# Altium PCB PCB2.PcbDoc
Units mil, origin at the board's own origin, x right, y up, seen from the top; angles counter-clockwise.
Board outline 3200 x 1060 mil, 4 copper layers (Top Layer, GND, Power, Bottom Layer), stack 23.756 mil thick; 140 components, 71 nets, 473 pads, 206 vias.
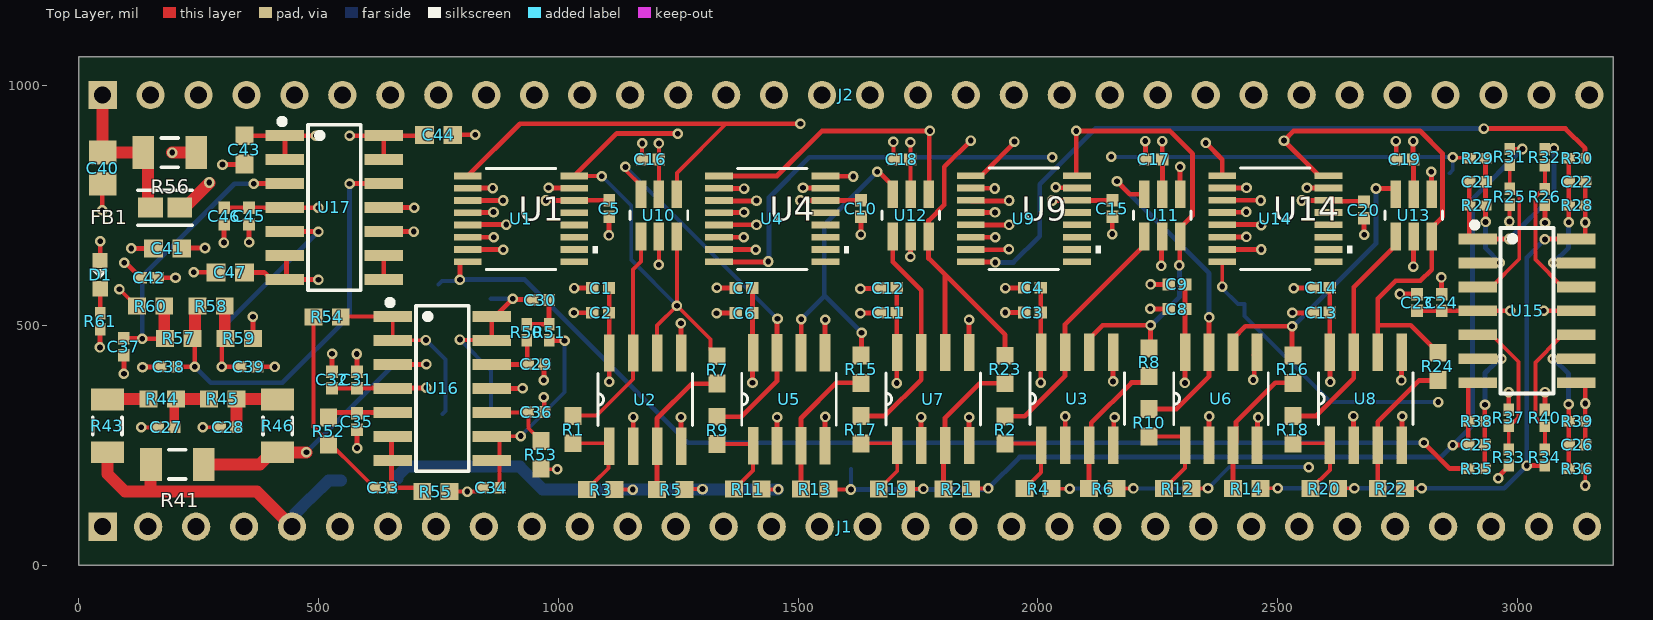
[diagram p0: Top Layer view]
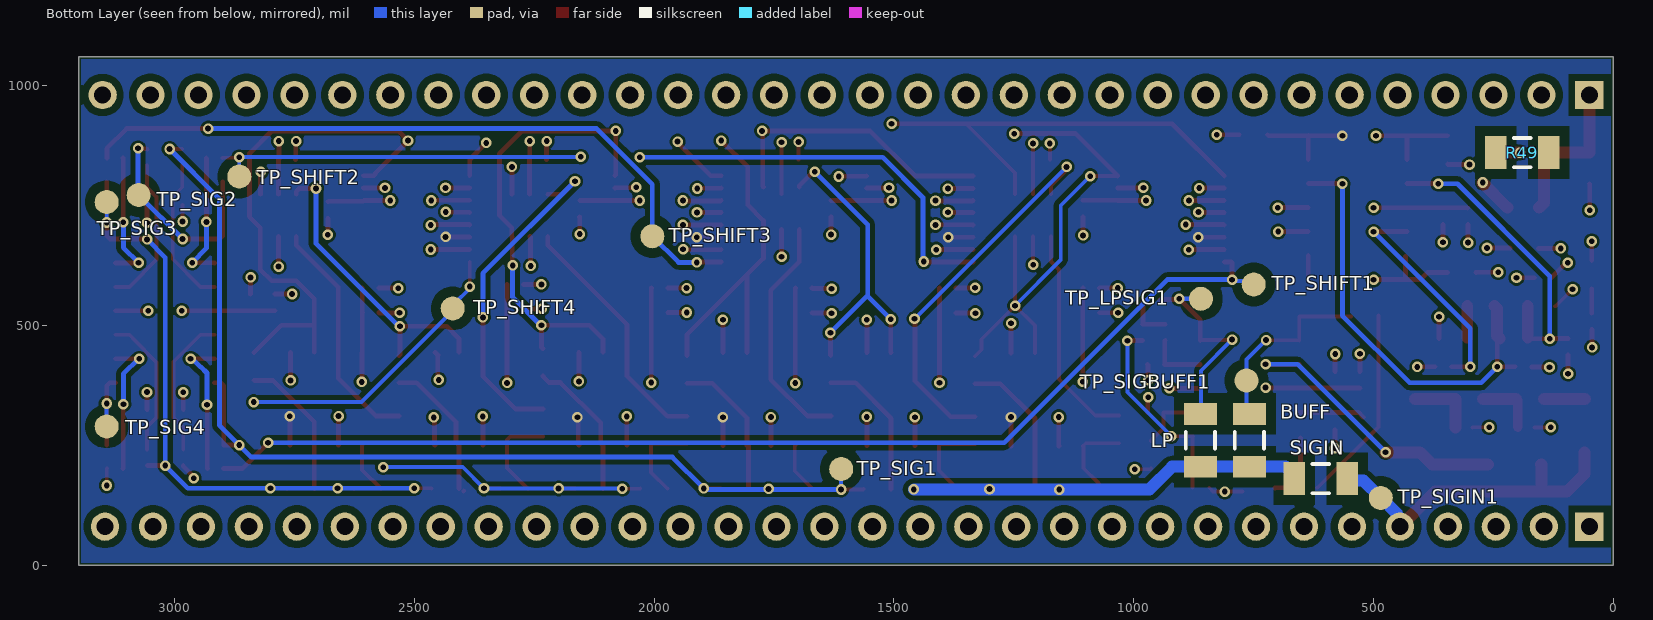
[diagram p1: Bottom Layer view, seen from below]
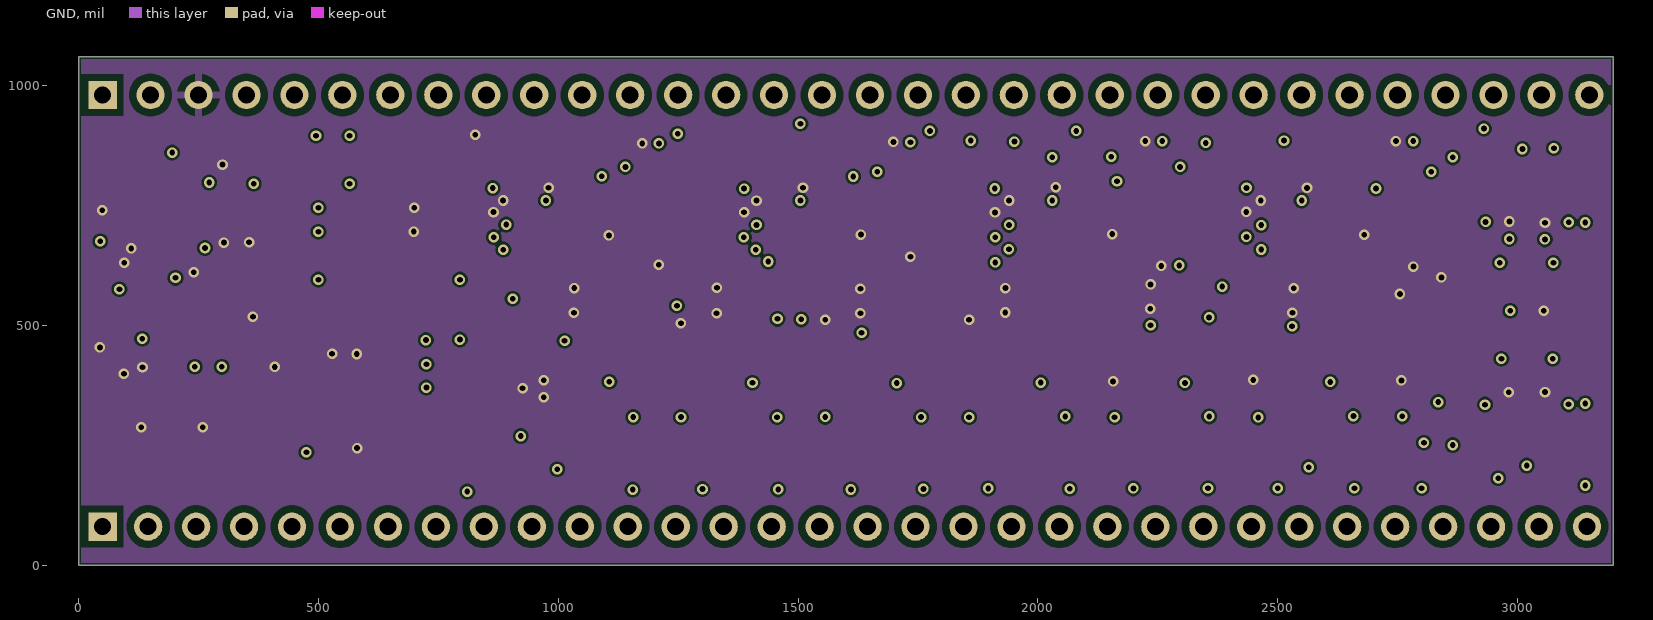
[diagram p2: GND]
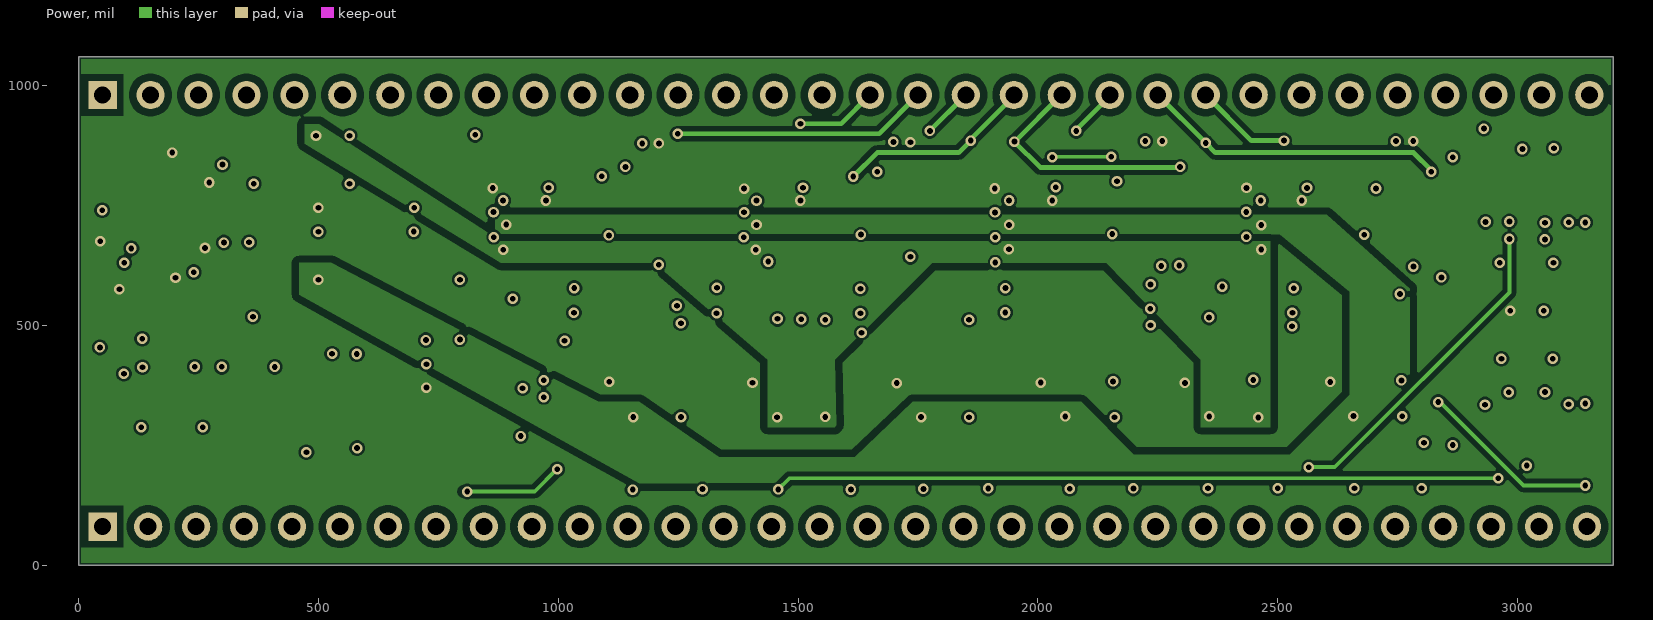
[diagram p3: Power]
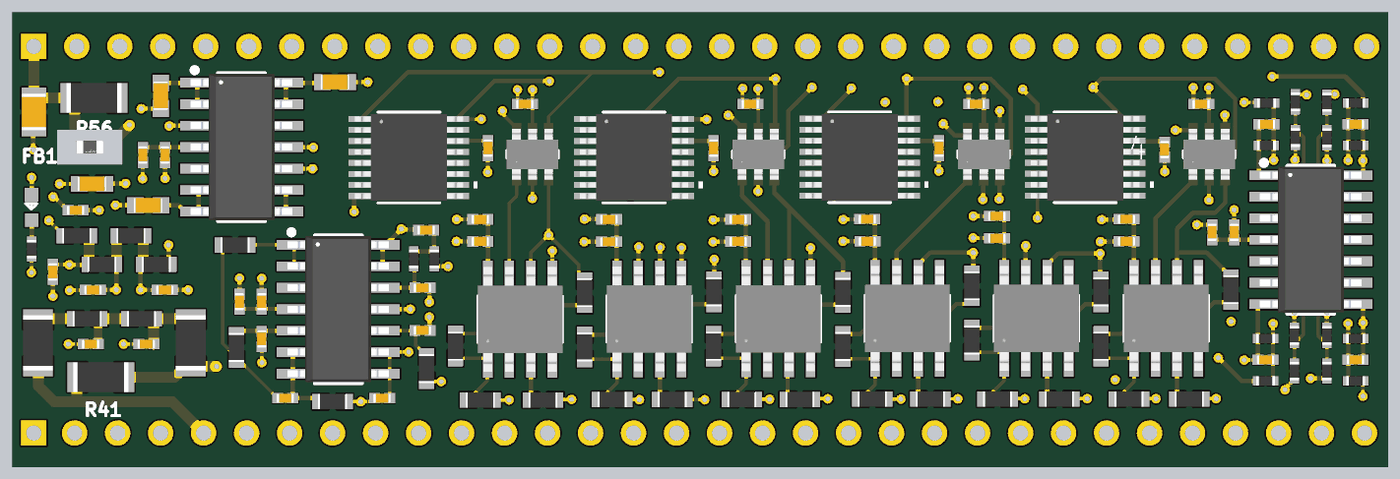
[diagram p4: 3D render of the assembled board from above, using the file's embedded part models]
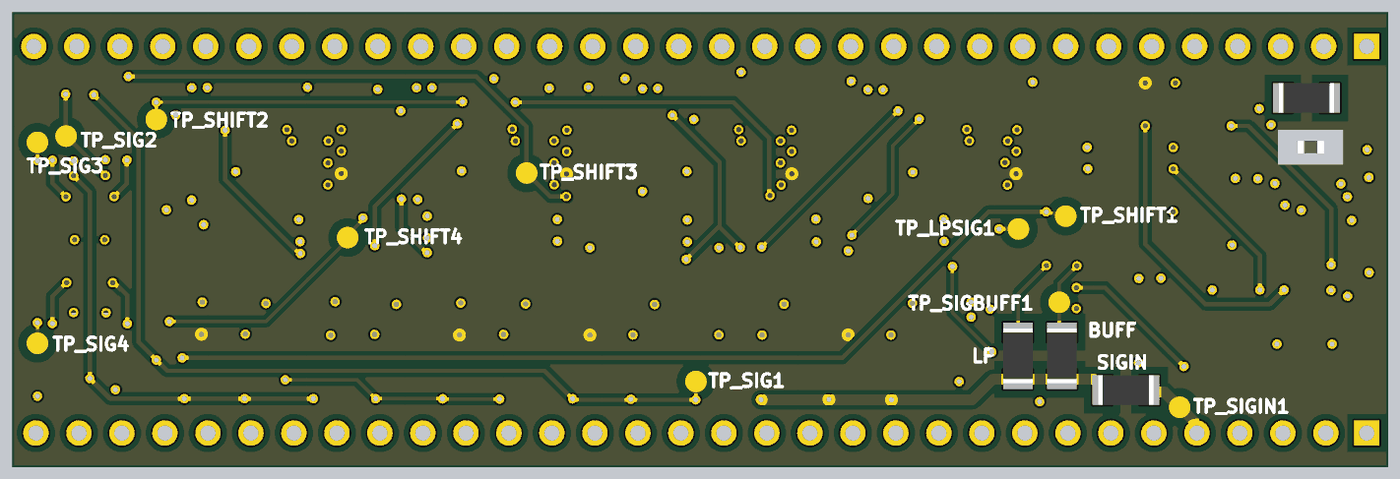
[diagram p5: 3D render of the assembled board from below, using the file's embedded part models]

## Layer stack, top to bottom
Top Solder: solder mask 0.4, Solder Resist, Dk 3.5
Top Layer: signal copper 1.4
Dielectric 2: prepreg 2.8, PP-006, Dk 4.1
GND: signal copper 1.378
Dielectric 1: dielectric 12.6, FR-4, Dk 4.8
Power: signal copper 1.378
Dielectric 3: prepreg 2.8, PP-006, Dk 4.1
Bottom Layer: signal copper 1.4
Bottom Solder: solder mask 0.4, Solder Resist, Dk 3.5

## Board outline
0,0 3200,0 3200,1060 0,1060

## Design rules (kind name [scope] priority, off if disabled: settings)
Clearance Clearance_Poly_Via [InPoly vs IsVia] p1: gap=5 ignorepadtopadclearanceinfootprint=FALSE except(0: Arc-Hole Track-Hole SMDPad-Hole THPad-Hole Via-Hole Fill-Hole Poly-Hole Region-Hole Text-Hole)
Clearance Clearance_Poly_Poly [(InPoly) vs (InPoly)] p2: gap=15 ignorepadtopadclearanceinfootprint=FALSE except(0: Arc-Hole Track-Hole SMDPad-Hole THPad-Hole Via-Hole Fill-Hole Poly-Hole Region-Hole Text-Hole)
Clearance Clearance_Poly_Wires [InPoly vs IsWire] p3: gap=10 ignorepadtopadclearanceinfootprint=FALSE except(0: Arc-Hole Track-Hole SMDPad-Hole THPad-Hole Via-Hole Fill-Hole Poly-Hole Region-Hole Text-Hole)
Clearance Clearance_Poly_KO [(Layer = 'KeepOutLayer') vs (InPoly)] p4: gap=15 ignorepadtopadclearanceinfootprint=FALSE except(0: Arc-Hole Track-Hole SMDPad-Hole THPad-Hole Via-Hole Fill-Hole Poly-Hole Region-Hole Text-Hole)
Clearance Clearance_Poly_Top_Btm [OnLayer('Top Layer') or OnLayer('Bottom Layer') vs InPoly] p5: gap=20 ignorepadtopadclearanceinfootprint=FALSE except(0: Arc-Hole Track-Hole SMDPad-Hole THPad-Hole Via-Hole Fill-Hole Poly-Hole Region-Hole Text-Hole)
Clearance Clearance_KO_All [(Layer = 'KeepOutLayer')] p6: gap=0 ignorepadtopadclearanceinfootprint=FALSE
Clearance Clearance_Poly_All [(InPoly)] p7: gap=15 ignorepadtopadclearanceinfootprint=FALSE except(0: Arc-Hole Track-Hole SMDPad-Hole THPad-Hole Via-Hole Fill-Hole Poly-Hole Region-Hole Text-Hole)
Clearance Clearance_All [All] p8: gap=5 ignorepadtopadclearanceinfootprint=FALSE except(0: Arc-Hole Track-Hole SMDPad-Hole THPad-Hole Via-Hole Fill-Hole Poly-Hole Region-Hole Text-Hole)
ComponentClearance [All] p1 off: gap=10 collisioncheckmode=3 verticalgap=10 showdistances=FALSE
DiffPairsRouting [All] p1: maxlimit=10 minlimit=5 mostfreqgap=5 toplayer_minwidth=5 toplayer_maxwidth=25 toplayer_prefwidth=5 midlayer1_minwidth=5 midlayer1_maxwidth=25 midlayer1_prefwidth=5 midlayer2_minwidth=5 midlayer2_maxwidth=25 midlayer2_prefwidth=5 bottomlayer_minwidth=5 bottomlayer_maxwidth=25 bottomlayer_prefwidth=5 maxuncoupledlength=500
FabricationTestPointUsage TestPointUsage [All] p1 off: valid=0 allowmultiple=FALSE
FabricationTestpoint Testpoint [All] p1 off: side=3 testpointundercomponent=TRUE minsize=40 maxsize=100 preferedsize=60 minholesize=0 maxholesize=40 preferedholesize=32 testpointgrid=1 allowsidetop=TRUE allowsidebottom=TRUE usegrid=TRUE gridtolerance=0.01
FanoutControl Fanout_BGA [IsBGA] p1 off: bgadir=Out bgaviamode=Centered fanoutstyle=Auto fanoutdirection=Alternating viagrid=1 // Fanout_BGA (Default Rule)
FanoutControl Fanout_LCC [IsLCC] p2 off: bgadir=Out bgaviamode=Centered fanoutstyle=Auto fanoutdirection=Alternating viagrid=1 // Fanout_LCC (Default Rule)
FanoutControl Fanout_SOIC [IsSOIC] p3 off: bgadir=Out bgaviamode=Centered fanoutstyle=Auto fanoutdirection=Alternating viagrid=1 // Fanout_SOIC (Default Rule)
FanoutControl Fanout_Small [(CompPinCount < 5)] p4 off: bgadir=Out bgaviamode=Centered fanoutstyle=Auto fanoutdirection=OutThenIn viagrid=1 // Fanout_Small (Default Rule)
FanoutControl Fanout_Default [All] p5 off: bgadir=Out bgaviamode=Centered fanoutstyle=Auto fanoutdirection=Alternating viagrid=1 // Fanout_Default (Default Rule)
Height [All] p1 off: minheight=0 maxheight=1000 prefheight=500
HoleSize [All] p1 off: absolutevalues=TRUE maxlimit=100 minlimit=1 maxpercent=80.000 minpercent=20.000
HoleToHoleClearance [All] p1 off: gap=10 allowstackedmicrovias=TRUE
LayerPairs [All] p1 off: enforce=TRUE
MinimumSolderMaskSliver [All] p1 off: minsoldermaskwidth=10
NetAntennae [All] p1 off: netantennaetolerance=0
PasteMaskExpansion [All] p1 off: expansion=0
PlaneClearance [All] p1 off: clearance=20
PlaneConnect [All] p1 off: planeconnectstyle=Relief reliefexpansion=20 reliefentries=4 reliefconductorwidth=20 reliefairgap=15
PolygonConnect PolygonConnect_vias [All vs isVia] p1: connectstyle=Direct reliefconductorwidth=10 reliefentries=4 polygonreliefangle="90 Angle" airgapwidth=10
PolygonConnect [All] p2: connectstyle=Relief reliefconductorwidth=15 reliefentries=4 polygonreliefangle="90 Angle" airgapwidth=15
RoomDefinition CtDSP_IO [InComponentClass('CtDSP_IO')] p1: confinementstyle=ConfineIn formatcopy=TRUE lockcomponents=FALSE outline 0,0 3200,0 3200,1060 0,1060
RoomDefinition U_CtDPS_Stage [InComponentClass('U_CtDPS_Stage')] p2: confinementstyle=ConfineIn formatcopy=TRUE lockcomponents=FALSE outline 0,0 3200,0 3200,1060 0,1060
RoutingCorners [All] p1 off: cornerstyle=45-Degree minsetback=100 maxsetback=100
RoutingLayers [All] p1 off: top layer_v5=FALSE mid layer 1_v5=TRUE mid layer 2_v5=TRUE bottom layer_v5=TRUE
RoutingPriority [All] p1 off: routingpriority=0
RoutingTopology [All] p1 off: topology=Shortest
RoutingVias [All] p1: holewidth=12 width=22 viastyle="Through Hole" minholewidth=6 minwidth=15 maxholewidth=50 maxwidth=50
SilkToSilkClearance [All] p1 off: silktosilkclearance=10
SilkToSolderMaskClearance SilkscreenOverComponentPads [IsPad] p1 off: minsilkscreentomaskgap=10 clearancetoexposedcopper=TRUE
SolderMaskExpansion SolderMaskExpansion_via [IsVia] p1: expansion=0 istentingtop=FALSE
SolderMaskExpansion [All] p2 off: expansion=4 istentingtop=FALSE
Width [All] p1: maxlimit=100 minlimit=5 preferedwidth=8
6 further rules are at their usual default settings.

## Classes and differential pairs
component class U_CtDPS_Stage: C1 C2 C3 C4 C5 C6 C7 C8 C9 C10 C11 C12 C13 C14 C15 C16 C17 C18 C19 C20 C21 C22 C23 C24 C25 C26 R1 R2 R3 R4 R5 R6 R7 R8 R9 R10 R11 R12 R13 R14 R15 R16 R17 R18 R19 R20 R21 R22 R23 R24 R25 R26 R27 R28 R29 R30 R31 R32 R33 R34 R35 R36 R37 R38 R39 R40 TP_SHIFT1 TP_SHIFT2 TP_SHIFT3 TP_SHIFT4 TP_SIG1 TP_SIG2 TP_SIG3 TP_SIG4 U1 U2 U3 U4 U5 U6 U7 U8 U9 U10 U11 U12 U13 U14 U15
component class CtDSP_IO: BUFF C27 C28 C29 C30 C31 C32 C33 C34 C35 C36 C37 C38 C39 C40 C41 C42 C43 C44 C45 C46 C47 D1 FB1 J1 J2 LP R41 R43 R44 R45 R46 R49 R50 R51 R52 R53 R54 R55 R57 R58 R59 R60 R61 SIGIN TP_LPSIG1 TP_SIGBUFF1 TP_SIGIN1 U16 U17

## Components (designator, comment, footprint, x,y, rotation, side; value= is the part's Value field where it differs from the comment)
BUFF "0" RES_1206 758.74,259.88 r270 bottom (schematic designator R47)
C1 "100nF" C_0402 1088.55,577.41 r180 top
C2 "2.2uF" C_0402 1088.55,526.06 r0 top
C3 "100nF" C_0402 1988.73,526.43 r180 top
C4 "2.2uF" C_0402 1988.48,577.78 r0 top
C5 "100nF" C_0402 1106.32,743.2 r270 top
C6 "100nF" C_0402 1387.68,525.41 r180 top
C7 "2.2uF" C_0402 1387.68,577.41 r0 top
C8 "100nF" C_0402 2290,533.65 r180 top
C9 "2.2uF" C_0402 2290,585 r0 top
C10 "100nF" C_0402 1631.24,743.2 r270 top
C11 "100nF" C_0402 1688.26,526.06 r180 top
C12 "2.2uF" C_0402 1688.26,577.41 r0 top
C13 "100nF" C_0402 2591.4,526.43 r180 top
C14 "2.2uF" C_0402 2591.4,577.78 r0 top
C15 "100nF" C_0402 2155.63,743.2 r270 top
C16 "100nF" C_0402 1192.14,845.68 r180 top
C17 "100nF" C_0402 2241.69,845.68 r180 top
C18 "100nF" C_0402 1716.57,845.68 r180 top
C19 "100nF" C_0402 2765,845.68 r180 top
C20 "100nF" C_0402 2680,740 r270 top
C21 "1pF" C_0402 2916.75,799 r180 top
C22 "1pF" C_0402 3124.2,799 r180 top
C23 "100nF" C_0402 2790.66,547.32 r90 top
C24 "10uF" C_0402 2842.01,547.32 r270 top
C25 "1pF" C_0402 2914.78,250.45 r180 top
C26 "1pF" C_0402 3124.2,250.45 r180 top
C27 "100nF" C_0402 182.32,286.94 r0 top
C28 "10nF" C_0402 311.61,286.94 r0 top
C29 "22nF" C_0402 953.85,418.32 r0 top
C30 "100nF" C_0402 962.68,552.51 r180 top
C31 "10uF" C_0402 580.32,385.86 r90 top
C32 "100nF" C_0402 528.5,385.86 r270 top
C33 "100nF" C_0402 635,161.05 r180 top
C34 "10nF" C_0402 860,161.05 r180 top
C35 "100nF" C_0402 580.32,299.08 r90 top
C36 "4.7nF" C_0402 953.96,318.95 r180 top
C37 "100nF" C_0402 94.38,455.08 r90 top
C38 "100nF" C_0402 187.68,413.27 r0 top
C39 "100nF" C_0402 354.69,413.27 r180 top
C40 "47uF" C_0805 50,827.52 r90 top
C41 "1uF" C_0603 185.47,660 r0 top
C42 "0.1uF" C_0402 147.32,598.81 r180 top
C43 "1uF" C_0603 345.48,865.39 r270 top
C44 "1uF" C_0603 750.51,897.01 r0 top
C45 "10uF" C_0402 355.32,727.32 r270 top
C46 "100nF" C_0402 303.68,727.32 r90 top
C47 "1uF" C_0603 315.95,610 r0 top
D1 "LED_0603" LED_6003 45.37,575.87 r90 top
FB1 "BLM18PG121SN1D" BLM18PG121SN1D 180.32,744.98 r0 top
J1 "DIP32" DIP32#1 45,80 r0 top
J2 "DIP32" DIP32#2 50,980 r0 top
LP "0" RES_1206 861.27,259.88 r270 bottom (schematic designator R48)
R1 "47k" RES_0603 1030.9,282.44 r90 top
R2 "47k" RES_0603 1931.74,281.54 r90 top
R3 "75" RES_0603 1088.55,157.08 r180 top
R4 "75" RES_0603 2000.33,159.2 r180 top
R5 "75" RES_0603 1234.39,157.08 r180 top
R6 "75" RES_0603 2135.34,159.2 r180 top
R7 "47k" RES_0603 1331.13,406.67 r90 top
R8 "47k" RES_0603 2231.85,422.7 r90 top
R9 "47k" RES_0603 1331.13,280.52 r90 top
R10 "47k" RES_0603 2231.85,296.54 r90 top
R11 "75" RES_0603 1395,158.17 r180 top
R12 "75" RES_0603 2291.46,159.2 r180 top
R13 "75" RES_0603 1534.61,158.17 r180 top
R14 "75" RES_0603 2435.33,159.2 r180 top
R15 "47k" RES_0603 1631.64,408.47 r90 top
R16 "47k" RES_0603 2531.96,408.47 r90 top
R17 "47k" RES_0603 1631.24,282.32 r90 top
R18 "47k" RES_0603 2531.96,282.32 r90 top
R19 "75" RES_0603 1696.89,158.23 r180 top
R20 "75" RES_0603 2597.25,159.2 r180 top
R21 "75" RES_0603 1831.81,158.23 r180 top
R22 "75" RES_0603 2737.23,159.2 r180 top
R23 "47k" RES_0603 1931.74,407.7 r90 top
R24 "47k" RES_0603 2834.14,413.97 r90 top
R25 "20K" RES_0402 2983.84,768.01 r90 top
R26 "20K" RES_0402 3057.1,767.33 r90 top
R27 "20K" RES_0402 2916.75,749.62 r180 top
R28 "20K" RES_0402 3124.33,749.62 r180 top
R29 "5K" RES_0402 2917.09,848.38 r0 top
R30 "5K" RES_0402 3124.2,848.38 r0 top
R31 "5K" RES_0402 2983.84,850.85 r270 top
R32 "5K" RES_0402 3057.1,850.18 r90 top
R33 "5K" RES_0402 2981.88,224.27 r90 top
R34 "5K" RES_0402 3057.1,224.27 r270 top
R35 "5K" RES_0402 2914.78,201.07 r0 top
R36 "5K" RES_0402 3124.33,201.07 r0 top
R37 "20K" RES_0402 2981.88,307.12 r90 top
R38 "20K" RES_0402 2914.78,299.83 r180 top
R39 "20K" RES_0402 3124.2,299.83 r180 top
R40 "20K" RES_0402 3057.1,307.12 r90 top
R41 "0" RES_1206 205.84,210 r0 top
R43 "0" RES_1206 60,290 r90 top
R44 "330" RES_0603 174.34,346.16 r0 top
R45 "3.3k" RES_0603 300.49,346.16 r0 top
R46 "0" RES_1206 415,290 r270 top
R49 "0" RES_1206 190,860 r0 bottom
R50 "220" RES_0402 934.17,485.41 r90 top
R51 "470" RES_0402 981.58,485.41 r270 top
R52 "330" RES_0603 521.1,279.39 r90 top
R53 "2.2k" RES_0603 963.81,230 r270 top
R54 "150" RES_0603 518.07,517.53 r180 top
R55 "3.3k" RES_0603 745,153.17 r180 top
R56 "0" RES_1206 190,860 r0 top
R57 "1k" RES_0603 208.54,472.49 r0 top
R58 "1k" RES_0603 276.15,539.59 r0 top
R59 "1k" RES_0603 335,472.49 r0 top
R60 "1k" RES_0603 150,539.59 r0 top
R61 "1k" RES_0402 45,508.27 r270 top
SIGIN "0" RES_1206 610.12,180 r0 bottom (schematic designator R42)
TP_LPSIG1 "TESTPOINT" TESTPOINT 860,555 r90 bottom
TP_SHIFT1 "TESTPOINT" TESTPOINT 750,585 r90 bottom
TP_SHIFT2 "TESTPOINT" TESTPOINT 2865,810 r0 bottom
TP_SHIFT3 "TESTPOINT" TESTPOINT 2003.78,685.41 r90 bottom
TP_SHIFT4 "TESTPOINT" TESTPOINT 2420,535 r90 bottom
TP_SIG1 "TESTPOINT" TESTPOINT 1610,200 r90 bottom
TP_SIG2 "TESTPOINT" TESTPOINT 3074.82,771.31 r90 bottom
TP_SIG3 "TESTPOINT" TESTPOINT 3141.52,756.59 r90 bottom
TP_SIG4 "TESTPOINT" TESTPOINT 3141.52,289.01 r90 bottom
TP_SIGBUFF1 "TESTPOINT" TESTPOINT 765,384.46 r90 bottom
TP_SIGIN1 "TESTPOINT" TESTPOINT 485,140 r90 bottom
U1 "ADG709BRUZ-REEL7" ADG709BRUZ-REEL7 923.46,720.59 r0 top
U2 "TLV3502AIDR" TLV3502AIDR 1181.08,345 r90 top
U3 "TLV3502AIDR" TLV3502AIDR 2081.8,346.75 r90 top
U4 "" ADG709BRUZ-REEL7 1447.01,720.59 r0 top
U5 "TLV3502AIDR" TLV3502AIDR 1481.18,345.73 r90 top
U6 "TLV3502AIDR" TLV3502AIDR 2381.9,346.75 r90 top
U7 "TLV3502AIDR" TLV3502AIDR 1781.69,346.11 r90 top
U8 "TLV3502AIDR" TLV3502AIDR 2683.8,346.75 r90 top
U9 "ADG709BRUZ-REEL7" ADG709BRUZ-REEL7 1971.93,720.96 r0 top
U10 "SN74LVC1G386DBVR" SN74LVC1G386DBVR 1205,730 r90 top
U11 "SN74LVC1G386DBVR" SN74LVC1G386DBVR 2254.31,730 r90 top
U12 "SN74LVC1G386DBVR" SN74LVC1G386DBVR 1729.92,730 r90 top
U13 "SN74LVC1G386DBVR" SN74LVC1G386DBVR 2778.68,730 r90 top
U14 "ADG709BRUZ-REEL7" ADG709BRUZ-REEL7 2496.32,720.96 r0 top
U15 "ADA4891-4ARZ-R7" ADA4891-4ARZ-R7 3021.69,540 r0 top
U16 "ADA4891-4ARZ-R7" ADA4891-4ARZ-R7 760,378.18 r0 top
U17 "ADA4891-4ARZ-R7" ADA4891-4ARZ-R7 535,755.56 r0 top

## Footprints (in the part's own frame and the unit in brackets; to place one, negate y for a bottom-side part, rotate by r counter-clockwise, add the part's x,y. Pads: shape width x height; smd on the part's side, far side on the other; paste and mask are expansions set on the pad)
ADA4891-4ARZ-R7 [mil]
  rect 80.24x22.6 smd: 1(-104.88,139.98) 2(-104.88,89.98) 3(-104.88,39.98) 4(-104.88,-10.02) 5(-104.88,-60.02) 6(-104.88,-110.02) 7(-104.88,-160.02) 8(101.34,-160.02) 9(101.34,-110.02) 10(101.34,-60.02) 11(101.34,-10.02) 12(101.34,39.98) 13(101.34,89.98) 14(101.34,139.98)
  silkscreen extent -117,-183 53,175, body extent -120,-180 116,161, height 69
ADG709BRUZ-REEL7 [mil]
  rect 58x14 smd paste+0 mask+0: 1(-112,90.57) 2(-112,64.98) 3(-112,39.39) 4(-112,13.8) 5(-112,-11.8) 6(-112,-37.39) 7(-112,-62.98) 8(-112,-88.57) 9(110,-88.57) 10(110,-62.98) 11(110,-37.39) 12(110,-11.8) 13(110,13.8) 14(110,39.39) 15(110,64.98) 16(110,90.57)
  silkscreen extent -73,-104 159,106, body extent -127,-100 125,102, height 47
BLM18PG121SN1D [mil]
  rect 51.42x41.66 smd paste+0 mask+0: 1(-30.55,0) 2(30.55,0)
  silkscreen extent -56,-37 56,37, body extent -76,-41 76,41, height 10
C_0402 [mm]
  rect 0.66x0.62 smd paste+0 mask+0.051: 1(-0.44,0) 2(0.44,0)
  body extent -0.53,-0.28 0.53,0.28, height 0.55
C_0603 [mm]
  rect 1x0.95 smd: 1(-0.75,0) 2(0.75,0)
  body extent -0.85,-0.45 0.85,0.45, height 0.9
C_0805 [mm]
  rect 1.25x1.45 smd: 1(-0.825,0) 2(0.825,0)
  body extent -1.1,-0.72 1.1,0.72, height 1.45
DIP32#1 [mm]
  rect 1.5x1.5 hole 0.9: 1(0.127,0)
  round 1.5 hole 0.9: 2(2.54,0) 3(5.08,0) 4(7.62,0) 5(10.16,0) 6(12.7,0) 7(15.24,0) 8(17.78,0) 9(20.32,0) 10(22.86,0) 11(25.4,0) 12(27.94,0) 13(30.48,0) 14(33.02,0) 15(35.56,0) 16(38.1,0) 17(40.64,0) 18(43.18,0) 19(45.72,0) 20(48.26,0) 21(50.8,0) 22(53.34,0) 23(55.88,0) 24(58.42,0) 25(60.96,0) 26(63.5,0) 27(66.04,0) 28(68.58,0) 29(71.12,0) 30(73.66,0) 31(76.2,0) 32(78.74,0)
DIP32#2 [mm]
  rect 1.5x1.5 hole 0.9: 1(0,0)
  round 1.5 hole 0.9: 2(2.54,0) 3(5.08,0) 4(7.62,0) 5(10.16,0) 6(12.7,0) 7(15.24,0) 8(17.78,0) 9(20.32,0) 10(22.86,0) 11(25.4,0) 12(27.94,0) 13(30.48,0) 14(33.02,0) 15(35.56,0) 16(38.1,0) 17(40.64,0) 18(43.18,0) 19(45.72,0) 20(48.26,0) 21(50.8,0) 22(53.34,0) 23(55.88,0) 24(58.42,0) 25(60.96,0) 26(63.5,0) 27(66.04,0) 28(68.58,0) 29(71.12,0) 30(73.66,0) 31(76.2,0) 32(78.74,0)
LED_6003 [mm]
  rect 0.8x0.8 smd: 1(0.004,0.009) 2(1.502,0.009)
  silkscreen extent 0.63,-0.31 0.97,0.37, body extent -0.05,-0.39 1.55,0.41, height 0.35
RES_0402 [mm]
  rect 0.65x0.55 smd paste+0 mask+0.05: 1(-0.425,0) 2(0.425,0)
  body extent -0.55,-0.28 0.55,0.28, height 0.35
RES_0603 [mm]
  rect 0.95x0.9 smd: 1(-0.725,0) 2(0.725,0)
  body extent -0.85,-0.45 0.85,0.45, height 0.55
RES_1206 [mm]
  rect 1.15x1.75 smd: 1(-1.4,0) 2(1.4,0)
  silkscreen extent -0.45,-0.77 0.45,0.77, body extent -1.63,-0.87 1.63,0.87, height 0.65
SN74LVC1G386DBVR [mil]
  rect 58x22 smd paste-29 mask-29: 1(-45,32.4) 2(-45,-5) 3(-45,-42.4) 4(43,-42.4) 5(43,-5) 6(43,32.4)
  silkscreen extent -10,-65 8,55, body extent -60,-65 58,55, height 57
TESTPOINT [mil]
  round 50 smd paste-99999 mask+0: 1(0,0)
TLV3502AIDR [mil]
  rect 78x22 smd: 1(-97,75) 2(-97,25) 3(-97,-25) 4(-97,-75) 5(97,-75) 6(97,-25) 7(97,25) 8(97,75)
  silkscreen extent -54,-98 54,98, body extent -122,-99 122,99, height 69

## Part data
BUFF LP R41 R43 R46 R49 R56 SIGIN: library part RES_1206, LCSC Part #=C17888
C1 C3 C5 C6 C8 C10 C11 C13 C15 C16 C17 C18 C19 C20 C23 C27 C30 C32 C33 C35 C37 C38 C39 C42 C46: library part C_0402, LCSC Part #=C1525
C2 C4 C7 C9 C12 C14: library part C_0402, LCSC Part #=C12530
C21 C22 C25 C26: library part C_0402, LCSC Part #=C1550
C24 C31 C45: library part C_0402, LCSC Part #=C15525
C28 C34: library part C_0402, LCSC Part #=C15195
C29: library part C_0402, LCSC Part #=C1532
C36: library part C_0402, LCSC Part #=C1538
C40: library part C_0805, LCSC Part #=C16780
C41 C43 C44 C47: library part C_0603, LCSC Part #=C15849
D1: LCSC Part #=C2286
FB1: "-55℃~+125℃ 1 120Ω@100MHz 2A 50mΩ ±25% 0603 Ferrite Beads ROHS", LCSC Part #=C14709
R1 R2 R7 R8 R9 R10 R15 R16 R17 R18 R23 R24: library part RES_0603, LCSC Part #=C25819
R3 R4 R5 R6 R11 R12 R13 R14 R19 R20 R21 R22: library part RES_0603, LCSC Part #=C4275
R25 R26 R27 R28 R37 R38 R39 R40: library part RES_0402, LCSC Part #=C25765
R29 R30 R31 R32 R33 R34 R35 R36: library part RES_0402, LCSC Part #=C5948099
R44 R52: library part RES_0603, LCSC Part #=C23138
R45 R55: library part RES_0603, LCSC Part #=C22978
R50: library part RES_0402, LCSC Part #=C25091
R51: library part RES_0402, LCSC Part #=C25117
R53: library part RES_0603, LCSC Part #=C4190
R54: library part RES_0603, LCSC Part #=C22808
R57 R58 R59 R60: library part RES_0603, LCSC Part #=C5123612
R61: library part RES_0402, LCSC Part #=C11702
U1 U9 U14: "CMOS Low Voltage, 3 Î© 4-Channel Multiplexer", LCSC Part #=C206785
U2 U3 U5 U6 U7 U8: "Dual 4.5ns Push-pull Rail-to-Rail Input, Rail-to-Rail Output TTL Comparators", LCSC Part #=C131165
U4: library part ADG709BRUZ-REEL7, "CMOS Low Voltage, 3 Î© 4-Channel Multiplexer", LCSC Part #=C206785
U10 U11 U12 U13: "Single 3-input, 1.65-V to 5.5-V XOR (exclusive OR) gate 6-SOT-23 -40 to 125", LCSC Part #=C2838503
U15 U16 U17: "Quad Rail-to-Rail Op-Amp, 240 MHz, 170 V/µs, SOT-23-5", LCSC Part #=C654290

## Via types
v1: diameter 22, hole 12, Top Layer to Bottom Layer, 206 vias

## Nets (pads, with @x,y where several pads share a name; then routed paths per layer and width w, separated by ;. In a path a pad name is that pad's centre, name@x,y a point inside that pad or via, vN(x,y) a via of type N, cw(c..) or ccw(c..) an arc to the next point about the centre after c; other vN are vias at no path point)
+1.25: C47.2 U1.5 U2.2 U3.2 U4.5 U7.2 U8.2 U9.5 U14.5 U17.6 U17.7 | length 766.6
  Top Layer w10: C47.2 386.84,610 401.3,595.54 U17.7 ; U17.7@433.59,595.54 433.59,643.13 U17.6@433.8,643.33 ; U17.7@435.08,595.27 499.73,595.27 v1(500,595) ; U1.5 812.47,709.81 v1(891.42,709.81) ; U2.2 1156.3,248.22 1156.3,308.15 v1(1156.51,308.37) ; U4.5 1335.75,709.53 1412.88,709.53 v1(1413.42,708.98) ; v1(1756.52,308.45) 1756.6,308.36 1756.6,249.19 U7.2 ; U9.5 1939.95,709.17 v1(1939.99,709.12) ; U3.2 2057.05,250 2057.05,309.5 v1(2057.3,309.75) ; U14.5 2385.29,710.14 2464.55,710.14 v1(2465.84,708.84) ; v1(2658,310.44) 2658.4,310.04 2658.4,250.15 U8.2
+1.25L: C39.2 R58.2 R59.1 U17.5 | length 599
  Top Layer w10: R59.1@297.94,469.73 298.38,469.29 v1(298.38,413.18) ; R59.1@304.69,474.25 R59.1 ; C39.2 337.32,413.22 v1(298.38,413.18) ; U17.5 430.39,695.27 499.73,695.27 v1(500,695) ; v1(298.38,413.18) v1(298.38,413.18)
  Top Layer w25: R59.1@304.69,474.25 R58.2
  Bottom Layer w10: v1(298.38,413.18) 298.38,493.38 v1(500,695)
+2.5: C44.1 U1.6 U2.4 U3.4 U4.6 U7.4 U8.4 U9.6 U14.6 U17.13 U17.14 | length 655.4
  Top Layer w10: v1(565,895) U17.14@636.34,895 ; U17.13 U17.14@636.34,895 ; U17.14 U17.14@636.34,895 ; C44.1 718.97,895 U17.14@636.34,895 ; U1.6 811.66,683.41 865.46,683.41 v1(865.67,683.61) ; v1(1255.93,308.37) 1256.01,308.3 1256.01,248.07 U2.4 ; U4.6 1335.17,683.36 1386.89,683.36 v1(1387.06,683.53) ; v1(1856.52,308.19) 1856.6,308.1 1856.6,249.19 U7.4 ; U9.6 1860.13,683.37 1910.76,683.37 v1(1910.97,683.17) ; U3.4 2158.38,251.34 2158.38,306.61 v1(2159.97,308.2) ; U14.6 2384.52,683.78 2434.73,683.78 v1(2434.93,683.98) ; U8.4 2759.4,250.35 2759.4,309.4 v1(2760,310)
+2.5L: C38.2 R57.2 R58.1 U17.12 | length 911.1
  Top Layer w10: C38.2 205.06,413.33 241.97,413.33 v1(242.03,413.39) 242.03,467.55 R57.2 ; v1(565,795) 565.27,795.27 636.07,795.27 U17.12
  Top Layer w25: R57.2 242.29,477.69 242.29,534.37 247.5,539.59 R58.1
  Bottom Layer w10: v1(242.03,413.39) 275.41,380 425,380 565,520 v1(565,795)
+3.75: C43.1 U1.7 U4.7 U5.2 U5.4 U6.2 U6.4 U9.7 U14.7 U17.1 U17.2 | length 750.9
  Top Layer w10: C43.1 345.56,895 U17.1@430.12,895 ; U17.2 U17.1@430.12,895 ; v1(495,895) U17.1@430.12,895 ; U1.7 811.52,657.55 885.51,657.55 v1(885.58,657.48) ; U4.7@1335.09,657.53 v1(1411.87,657.53) ; U5.2 v1(1456.21,308.3) ; U5.4 1556.4,248.94 1556.4,308.47 v1(1556.61,308.68) ; U9.7 1860.75,657.17 1938.76,657.17 v1(1939.72,658.12) ; U6.2 2357.06,249.91 2357.06,309.61 v1(2357.21,309.76) ; U14.7 2465.67,657.98 v1(2465.84,657.8) ; U6.4 2458.17,251.02 2458.17,306.4 v1(2459.43,307.66)
+3.75L: C37.2 R57.1 R60.2 U17.3 | length 662
  Top Layer w10: C37.2 94.66,472.13 132.21,472.13 v1(132.49,471.86) 179.37,471.86 R57.1 R57.1@178.54,473.95 ; v1(365,795) 365.27,795.27 429.85,795.27 U17.3
  Top Layer w25: R57.1@178.54,473.95 R60.2
  Bottom Layer w10: v1(132.49,471.86) 132.49,602.49 325,795 v1(365,795)
+5: C1.1 C2.2 C3.1 C4.2 C5.1 C6.1 C7.2 C8.1 C9.2 C10.1 C11.1 C12.2 C13.1 C14.2 C15.1 C16.1 C17.1 C18.1 C19.1 C20.1 C23.1 C24.2 C31.1 C32.2 C41.2 C42.1 C45.1 C46.2 D1.2 FB1.2 R56.2 R60.1 U1.2 U1.14 U2.8 U3.8 U4.2 U4.14 U5.8 U6.8 U7.8 U8.8 U9.2 U9.14 U10.5 U11.5 U12.5 U13.5 U14.2 U14.14 U15.4 U16.4 U17.4 | length 3244.5
  Top Layer w8: v1(85,575) 85.06,575 120.47,539.59 R60.1 ; U10.5 v1(1210,879) ; v1(1734.24,881.42) 1734.58,881.08 1734.58,773.34 U12.5
  Top Layer w10: D1.2 v1(45,675) ; C42.1 164.7,598.76 201.96,598.76 v1(202.01,598.71) ; C41.2 215.92,660.92 v1(263.5,660.92) ; FB1.2@216.11,745 FB1.2@220.99,745 ; v1@272.5,796.51 v1(272.5,797.5) ; C46.2 303.86,744.82 499.82,744.82 v1(500,745) ; C32.2 529.18,369.23 724.4,369.23 v1(725.09,369.91) ; U1.2 811.66,785.77 863.25,785.77 v1(863.46,785.97) ; v1(974.37,760.05) v1(974.37,760.05) 1032.91,760.01 1033.46,760.56 C5.1@1106.29,760.56 ; C1.1 1106.23,577.05 1106.23,382.49 v1(1106.59,382.13) ; U4.2 1335.35,785.23 1387.15,785.23 v1(1387.48,784.89) ; v1(1405,380) C6.1 C7.2 ; v1(1505,760) 1505.26,760.26 1630.98,760.26 C10.1 ; C12.2 1705.82,577.18 1705.82,379.55 v1(1706.05,379.32) ; U9.2 1860.4,785.47 1909.53,785.47 v1(1910,785) ; C4.2 2006.05,577.54 2006.05,380.66 v1(2006.29,380.42) ; v1(2030.04,760) 2030.31,760.26 2154.63,760.26 C15.1@2154.89,760.53 ; U11.5 2259.74,773.42 2259.74,845.68 2259.3,846.12 2259.3,883.71 v1(2259.59,884) ; v1(2306.65,379.57) 2306.99,379.91 2306.99,584.66 C9.2 ; U14.2 2384.52,786.13 2434.81,786.13 v1(2435,786.33) ; v1(2550,760) 2550.17,760.17 2604.73,760.17 2606.32,758.58 2678.75,758.58 C20.1 ; C14.2 2608.72,526.88 2608.27,526.43 2608.76,525.94 2608.76,444.24 2609.33,443.67 2609.33,382.31 v1(2609.86,381.78) ; v1(2782.6,884) 2782.46,883.86 2782.46,846.36 2783.14,845.68 2783.14,773.54 U13.5 ; C23.1 v1(2984.99,530.01)
  Top Layer w25: v1(195,860) R56.2 ; FB1.2@220.99,745 v1@272.5,796.51
+5IN: C40.2 FB1.1 J2.1 R56.1 | length 328.2
  Top Layer w25: J2.1 C40.2 R56.1 145,849.88 145,755 FB1.1@155,745
B1: J2.17 U1.1 U10.4 | length 1098
  Top Layer w8: U10.4 1247.4,817.4 1350,920
  Top Layer w10: U1.1 920.3,920 1350,920 v1(1505,920)
  Power w10: v1(1505,920) 1590,920 J2.17
B2: J2.18 R7.2 U1.16 U2.6 U10.3 | length 1580
  Top Layer w8: U1.16 1033.63,810.98 1090.55,810.98 v1(1090.72,810.81) ; U2.6 1206.08,499.31 v1(1247.4,540.63) ; U10.3 v1(1247.4,540.63) ; R7.2 1317.41,448.93 1317.41,470.62 v1(1247.4,540.63)
  Top Layer w10: U1.16 1122.3,900 1248,900 v1(1249,899)
  Power w10: v1(1249,899) 1669,899 J2.18
  Bottom Layer w8: v1(1090.72,810.81) 1152.41,749.12 1152.41,635.62 v1(1247.4,540.63)
B3: J2.19 U4.1 U12.4 | length 703
  Top Layer w10: U4.1 1456.15,811.15 1550,905 v1(1775,905) 1773.66,903.66 1773.66,789.34 U12.4@1772.32,788
  Power w10: v1(1775,905) J2.19
B4: J2.20 R23.2 U4.16 U7.6 U12.3 | length 1179.8
  Top Layer w10: U4.16 1557.59,810.58 1614.42,810.58 v1(1615,810) ; U7.6 1806.69,605 ; v1(1860,885) 1805,830 1805,750.68 1772.32,718 1772.32,639.37 1806.69,605 ; R23.2 1931.74,479.95 1806.69,605
  Power w10: v1(1615,810) 1665,860 1835,860 v1(1860,885) 1860,887.5 1950,977.5 J2.20
B5: J2.21 U9.1 U11.4 | length 685.8
  Top Layer w10: U9.1 1881.93,811.53 1951.13,880.73 v1(1951.13,882.82) ; U11.4@2296.54,773.46 2296.63,773.55 2296.63,829.91 v1(2296.54,830)
  Power w10: J2.21 2049.16,980 1951.97,882.82 v1(1951.13,882.82) 2004.95,829 2295.54,829 v1(2296.54,830)
B6: J2.22 R8.2 U3.6 U9.16 U11.3 | length 1073.7
  Top Layer w10: U9.16 2080,813.46 v1(2080,905) 2275.3,905 2322.72,857.58 2322.72,729 2296.72,703 U11.3 2295.89,684.17 2295.89,625.41 v1(2295.06,624.58) ; U3.6 2106.8,471.75 2135.04,500 v1(2235,500) 2235,454.39 R8.2
  Power w10: v1(2080,905) 2080,907.5 2150,977.5 J2.22
  Bottom Layer w10: v1(2235,500) 2236.96,500 2295.06,558.11 v1(2295.06,624.58)
B7: J2.23 U13.4 U14.1 | length 768.5
  Top Layer w10: v1(2350,880) 2384.5,845.5 2384.5,813.53 2384.32,813.36 U14.1 ; v1(2820,820) 2820.54,819.46 2820.54,773.54 U13.4
  Power w10: J2.23 v1(2350,880) 2370,860 2783.25,860 2820,823.25 v1(2820,820)
B8: J2.24 R24.2 U8.6 U13.3 U14.16 | length 1336.2
  Top Layer w10: U14.16 2584.32,811.53 2582.32,813.53 2582.32,815.92 v1(2513.25,885) 2533.25,905 2796.77,905 2844,857.77 2844,725.92 2821.08,703 U13.3 2821.08,616.08 2797.64,592.64 2745.87,592.64 2708.8,555.57 2708.8,500 ; U8.6 2708.8,500 ; R24.2 2834.14,443.5 2777.64,500 2708.8,500
  Power w10: J2.24 2445,885 v1(2513.25,885)
COMP1_S1: R1.2 U2.7 U10.1 | length 460.7
  Top Layer w8: R1.2@1030.9,311.74 1080.25,311.74 1155.76,387.25 U2.7@1155.76,441.89 ; U2.7@1155.87,442 1155.87,615.87 1172.6,632.6 U10.1
COMP1_S2: R17.2 U7.7 U12.1 | length 494.7
  Top Layer w10: R17.2 1680.86,310.86 1756.69,386.69 U7.7 1756.69,572.71 1697.52,631.89 U12.1@1697.52,700
COMP1_S3: R2.2 U3.7 U11.1 | length 519.1
  Top Layer w10: R2.2 1972.73,310.09 2056.8,394.16 2056.8,501.88 2221.91,667 U11.1
COMP1_S4: R18.2 U8.7 U13.1 | length 491.2
  Top Layer w10: R18.2 2580.23,310.86 2658.8,389.44 U8.7 2658.8,579.53 2746.28,667 U13.1
COMP3_S1: R9.2 U5.7 U10.6 | length 804.6
  Top Layer w8: v1(1140,830) 1142.68,827.32 1142.68,820.92 1172.6,791 U10.6
  Top Layer w10: R9.2 1381.39,309.06 1456.29,383.96 U5.7@1456.29,442.62 ; U5.7 1456.18,512.24 v1(1457.14,513.2)
  Bottom Layer w8: v1(1140,830) 1140.34,830 v1(1457.14,513.2)
COMP3_S2: R15.2 U5.6 U12.6 | length 647.3
  Top Layer w10: U5.6 1506.51,443.05 1506.51,511.84 v1(1506.84,512.16) ; R15.2 1632.53,437.91 v1(1632.53,484.25) ; v1(1665,820) 1667.3,817.7 1670.81,817.7 1697.52,791 U12.6@1697.52,788
  Bottom Layer w10: v1(1506.84,512.16) 1554.84,560.16 ; v1(1632.53,484.25) 1556.62,560.16 1554.84,560.16 ; v1(1665,820) 1554.84,709.84 1554.84,560.16
COMP3_S3: R10.2 U6.7 U11.6 | length 707.8
  Top Layer w10: v1(2165,800) 2192,773 U11.6 ; R10.2 2288.94,325.09 2357.03,393.18 v1(2357.03,516.19)
  Bottom Layer w10: v1(2165,800) 2357.03,607.97 v1(2357.03,516.19)
COMP3_S4: R16.2 U6.6 U13.6 | length 637.4
  Top Layer w10: U6.6 2406.9,471.75 2432.9,497.75 2527.75,497.75 2530,500 2530,438.97 R16.2 ; v1(2705,785) 2740.28,785 2746.28,779 U13.6
  Bottom Layer w10: v1(2530,498) 2532.7,498 2705,670.3 v1(2705,785)
GND: C1.2 C2.1 C3.2 C4.1 C5.2 C6.2 C7.1 C8.2 C9.1 C10.2 C11.2 C12.1 C13.2 C14.1 C15.2 C16.2 C17.2 C18.2 C19.2 C20.2 C23.2 C24.1 C27.1 C28.1 C29.2 C31.2 C32.1 C35.1 C36.1 C37.1 C38.1 C39.1 C40.1 C41.1 C42.2 C43.2 C44.2 C45.2 C46.1 C47.1 J2.3 R25.1 R26.1 R37.2 R40.2 R59.2 R61.2 U1.3 U1.4 U1.15 U2.5 U3.5 U4.3 U4.4 U4.15 U5.5 U6.5 U7.5 U8.5 U9.3 U9.4 U9.15 U10.2 U11.2 U12.2 U13.2 U14.3 U14.4 U14.15 U15.11 U16.11 U17.10 U17.11 | length 3400.3
  Top Layer w8: v1(130.44,287) 164.93,287 C27.1 ; v1(258.73,287.09) 294.13,287.09 C28.1 ; C16.2 1175,845.86 v1(1175,879) ; v1(1209.61,626.22) 1209.8,626.42 1209.8,684.8 U10.2 ; v1(1698.91,882.18) 1698.91,846.02 C18.2 ; v1(2983.32,716.16) 2983.58,716.42 2983.58,751.01 R25.1
  Top Layer w10: v1(44.48,453.61) 44.74,453.87 44.74,491.28 R61.2 ; v1(49.09,739.52) 49.09,794.13 C40.1 ; C37.1 94.42,437.72 94.42,398.8 v1(94.46,398.76) ; v1(95,630) 98.02,630 129.21,598.81 C42.2 ; v1(110,660) C41.1 ; v1(133.17,412.3) 133.66,412.78 169.87,412.78 C38.1 ; v1(240.06,610.56) 285.86,610.56 C47.1 ; v1(300,835) 344.61,835 C43.2 ; v1(303.02,672.2) 303.35,672.54 303.35,709.66 C46.1 ; v1(355.31,672.72) C45.2 ; v1(363.39,517.65) 363.39,472.64 R59.2 ; C39.1 372.1,413.18 408.97,413.18 v1(409.06,413.09) ; C32.1 v1@528.5,440.45 ; v1(580.09,439.91) 580.2,439.8 580.2,403.3 C31.2 ; C35.1 580.42,281.66 580.42,243.92 v1(580.51,243.82) ; U17.10 636.47,695.41 698.61,695.41 v1(698.74,695.28) ; U17.11 636.61,745.27 699.73,745.27 v1(700,745) ; C44.2 780.12,896.92 v1(826.75,896.92) ; U1.4 812.17,735.09 864.29,735.09 v1(865,735.81) ; U1.3 v1(885,760) ; U16.11 861.46,368.29 925.62,368.29 v1(925.74,368.41) ; v1(970,350) 970.64,349.36 970.64,319.59 C36.1 ; v1(970,385) 970.59,385.59 970.59,417.73 C29.2 ; v1(979.96,786.55) 980.45,786.06 1032.96,786.06 U1.15 ; v1(1032.72,526.16) 1032.77,526.11 C2.1 C2.1 ; v1@1033.62,577.43 C1.2 ; v1(1105.69,687.13) 1106.01,687.44 1106.01,725.56 C5.2 ; v1(1255.79,503.96) 1255.93,503.81 1255.93,442.14 U2.5 ; v1@1256.17,503.96 1256.17,510.24 v1@1256.27,510.34 ; v1(1330.1,525.1) 1330.25,525.25 1370.2,525.25 C6.2 ; v1(1330.93,578.32) 1331.38,577.86 1369.9,577.86 C7.1 ; U4.4 1335.58,734.95 1386.91,734.95 v1(1387.48,735.53) ; U4.3 1336.09,758.89 1412.51,758.89 v1(1413.42,759.8) ; v1(1510.3,786.48) 1510.75,786.02 1556.55,786.02 U4.15 ; U5.5 1556.35,442.89 1556.35,511.12 v1(1556.52,511.28) ; v1(1630,525) 1630.53,525.53 1670.41,525.53 C11.2 ; v1(1630.01,576.06) 1630.68,576.74 1670.27,576.74 C12.1 ; v1(1631.05,688.97) 1631.14,689.07 1631.14,725.78 C10.2 ; v1(1734.35,642.53) 1734.63,642.82 1734.63,699.72 U12.2@1734.92,700 ; v1(1856.59,511.23) v1(1856.59,511.23) 1856.64,443.16 U7.5 ; U9.4 1860.13,734.96 1910.49,734.96 v1(1910.69,735.17) ; U9.3 1861.27,759 1939,759 v1(1940,760) ; v1(1932.16,526.43) C3.2 ; v1(1932.32,577.31) 1932.55,577.54 1970.92,577.54 C4.1 ; v1(2037.11,787.41) 2037.84,786.67 2081.19,786.67 U9.15 ; v1(2155,690) 2155.32,690.32 2155.32,725.56 C15.2 ; U3.5 2156.87,443.68 2156.87,382.92 v1(2156.95,382.84) ; v1(2224.03,884) 2224.2,883.83 2224.2,845.85 C17.2 ; v1(2234.56,534.38) 2234.93,534.01 2272.31,534.01 C8.2 ; v1(2235,585) C9.1 ; v1(2257.21,623.6) 2257.95,624.33 2257.95,684.27 U11.2@2258.68,685 ; U14.4 2385.01,735.45 2433.96,735.45 v1(2434.65,736.14) ; U14.3 2464.67,760.33 v1(2465,760) ; v1(2449.12,385.88) 2451.41,388.18 2451.41,437.24 2450.9,437.75 U6.5 ; v1(2530.72,525.72) 2573.36,525.72 C13.2 ; v1(2533.81,576.94) 2534.23,577.36 2573.65,577.36 C14.1 ; v1(2561.16,786.16) 2561.27,786.05 2606.21,786.05 U14.15 ; C20.2 2680.17,722.5 2680.17,688.55 v1(2680.35,688.37) ; v1(2746.52,884) 2747.1,883.42 2747.1,846.26 C19.2 ; v1(2755,565) 2755.18,564.82 2790.49,564.82 C23.2 ; v1(2758.09,384.86) 2758.45,385.22 2758.45,443.4 U8.5 ; v1(2782.98,622.29) 2783.33,622.64 2783.33,684.65 U13.2 ; v1(2841.46,599.62) 2841.74,599.34 2841.74,564.92 C24.1 ; R37.2@2981.9,323.87 v1@2981.9,360.03 ; v1(3055,530) U15.11 ; R40.2 3057.26,324.01 3057.26,360.39 v1(3057.42,360.55) ; R26.1 3057.28,750.42 3057.28,713.76 v1(3057.47,713.57)
  other v1: 2981.92,360.06 528.51,440.46 1033.59,577.46
LP_S1: C33.1 R55.2 U16.6 U16.7 | length 157.7
  Top Layer w10: U16.6@652.32,265.44 C33.1 705.14,161.05 R55.2@705.46,160.72
LP_S2: C34.1 R51.2 U16.8 U16.9 | length 422.1
  Top Layer w8: U16.9@876.54,268.4 877.32,267.62 C34.1 ; U16.9@876.54,268.46 921.65,268.46 v1(921.95,268.76)
  Top Layer w10: R51.2 982.09,468.17 1012.79,468.17 v1(1013.31,467.65)
  Bottom Layer w8: v1(921.95,268.76) 1013.31,360.13 v1(1013.31,467.65)
LP_SIG: C30.2 LP.1 TP_LPSIG1.1 U16.13 U16.14 | length 440.9
  Top Layer w8: v1(795,470) 795.92,469.08 860.42,469.08 U16.13
  Top Layer w10: U16.13 861.34,511.34 v1(905,555) 906.24,553.76 944.11,553.76 C30.2
  Bottom Layer w8: v1(795,470) 860,405 860,316.27 LP.1
  Bottom Layer w10: TP_LPSIG1.1 v1(905,555)
NetC21_1: C21.1 R27.1 R29.2 U15.2 | length 277.1
  Top Layer w10: U15.2 2917.04,630.21 2963.04,630.21 v1(2963.27,630.44) ; v1(2933.41,715.38) 2933.62,715.58 2933.62,848.17 R29.2
  Bottom Layer w10: v1(2933.41,715.38) 2933.41,660.3 v1(2963.27,630.44)
NetC22_2: C22.2 R28.2 R30.1 U15.13 | length 279.9
  Top Layer w10: v1(3075,630) U15.13 ; v1(3106.7,714.88) 3107.08,715.26 3107.08,848 R30.1
  Bottom Layer w10: v1(3075,630) 3106.7,661.7 v1(3106.7,714.88)
NetC25_1: C25.1 R35.2 R38.1 U15.6 | length 295.7
  Top Layer w10: U15.6 v1@2966.45,429.96 ; R35.2 2931.92,201.48 2931.92,333.93 v1(2932.34,334.34)
  Bottom Layer w10: v1(2932.34,334.34) 2932.34,400.36 2945.47,413.5 2946.78,413.5 2963.22,429.94 v1(2966.47,429.94)
NetC26_2: C26.2 R36.1 R39.2 U15.9 | length 293.7
  Top Layer w10: v1(3073.41,430.13) 3073.49,430.06 3122.96,430.06 U15.9 ; v1(3106.62,334.93) 3107.11,334.44 3107.11,201.56 R36.1
  Bottom Layer w10: v1(3073.41,430.13) 3074.87,430.13 3106.62,398.38 v1(3106.62,334.93)
NetC27_2: C27.2 R44.2 R45.1 | length 129.6
  Top Layer w10: R44.2@199.65,342.92 R44.2
  Top Layer w20: C27.2 R44.2@199.65,342.92
  Top Layer w25: R44.2 R45.1
NetC28_2: C28.2 R45.2 R46.1 | length 145.7
  Top Layer w8: R45.2@328.93,346.06 R45.2 ; R46.1@413.96,346.16 R46.1
  Top Layer w25: C28.2 R45.2@328.93,346.06 ; R45.2 R46.1@413.96,346.16
NetC29_1: C29.1 R50.1 U16.12 | length 126.6
  Top Layer w10: U16.12 861.41,418.24 936.45,418.24 C29.1 935.35,419.5 935.35,467.5 R50.1
NetC30_1: C30.1 R50.2 R51.1 | length 98.4
  Top Layer w10: R50.2 R51.1 980.79,502.94 980.79,551.72 C30.1
NetC33_2: C33.2 R52.1 R54.2 | length 412.3
  Top Layer w8: R54.2@490,520 490,287.94 616.89,161.05 C33.2
NetC34_2: C34.2 R53.2 R55.1 | length 320
  Top Layer w8: R55.1 834.8,153.17 C34.2 ; R53.2 965.45,199.81 v1(997.81,199.81)
  Power w8: v1@804.17,153.17 951.17,153.17 v1(997.81,199.81)
  other v1: 810.47,153.11
NetC35_2: C35.2 R52.2 U16.5 | length 138.3
  Top Layer w10: R52.2 531.32,318.16 U16.5
NetC36_2: C36.2 R53.1 U16.10 | length 147.1
  Top Layer w8: U16.10 938.21,318.16 938.21,285.12 963.81,259.53 R53.1
NetD1_1: D1.1 R61.1 | length 51
  Top Layer w10: R61.1 D1.1
NetR1_1: R1.1 R3.2 U2.1 | length 188.2
  Top Layer w8: R1.1 1100.18,253.9 U2.1 1104.61,246.53 1104.61,201.69 1074.71,171.78 1074.71,170.8 1060.99,157.08 R3.2
NetR2_1: R2.1 R4.2 U3.1 | length 182
  Top Layer w8: R2.1 2003.55,253 U3.1 2006.8,193.23 1972.77,159.2 R4.2
NetR5_2: R5.2 R7.1 U2.3 | length 304
  Top Layer w10: R5.2@1195.84,152.08 R5.2@1195.96,152.19 ; R5.2@1205.96,157.19 1205.96,305.96 1278.13,378.13 R7.1
NetR6_2: R6.2 R8.1 U3.3 | length 300.6
  Top Layer w10: R6.2 U3.3 2111.38,254.34 2111.38,296.38 2195.45,380.45 2219.13,380.45 2231.85,393.17 R8.1
NetR9_1: R9.1 R11.2 U5.1 | length 184
  Top Layer w8: R9.1 1402.94,251.97 U5.1 1406.18,196.92 1367.44,158.17 R11.2
NetR10_1: R10.1 R12.2 U6.1 | length 198.6
  Top Layer w8: R10.1 2299.9,268 2306.9,261 U6.1 2306.9,202.21 2263.9,159.2 R12.2
NetR13_2: R13.2 R15.1 U5.3 | length 325.1
  Top Layer w10: R13.2 U5.3@1506.07,269.83 ; U5.3 1506.18,269.83 1506.18,306.18 1579.93,379.93 R15.1
NetR14_2: R14.2 R16.1 U6.3 | length 294.3
  Top Layer w10: R14.2@2396.79,154.2 R14.2@2396.9,154.31 ; R14.2@2406.9,159.31 U6.3 2412.9,255.75 2412.9,297.9 2494.93,379.93 R16.1
NetR17_1: R17.1 R19.2 U7.1 | length 184.7
  Top Layer w8: R17.1 1702.02,253.77 U7.1 1706.69,195.59 1669.33,158.23 R19.2
NetR18_1: R18.1 R20.2 U8.1 | length 186.3
  Top Layer w8: R18.1 2604.78,253.77 U8.1 2608.8,198.31 2569.69,159.2 R20.2
NetR21_2: R21.2 R23.1 U7.3 | length 303.5
  Top Layer w10: R21.2 U7.3@1803.26,249.11 ; U7.3 1806.69,306.69 1879.15,379.15 R23.1
NetR22_2: R22.2 R24.1 U8.3 | length 300.8
  Top Layer w10: R22.2 U8.3@2708.69,249.75 ; U8.3 2708.8,298.8 2795,385 2833.71,385 R24.1
NetR25_2: R25.2 R31.2 U15.3 | length 315.2
  Top Layer w8: U15.3 2945.63,579.98 3003.67,638.02 3003.67,767.8 2983.84,787.62 R31.2
NetR26_2: R26.2 R32.1 U15.12 | length 314.1
  Top Layer w8: R32.1 3057.1,786.95 3037.27,767.12 3037.27,636.92 3094.21,579.98 U15.12
NetR33_2: R33.2 R37.1 U15.5 | length 299.4
  Top Layer w8: U15.5 2945.63,479.98 3001.92,423.69 3001.92,307.54 2981.88,287.5 R33.2
NetR34_1: R34.1 R40.1 U15.10 | length 299.6
  Top Layer w8: R34.1 3057.1,287.5 3037.27,307.32 3037.27,422.27 3086.91,471.91 3086.91,472.68 3094.21,479.98 U15.10
NetR43_2: R43.2 R44.1 | length 85.4
  Top Layer w25: R43.2@59.41,346.16 R44.1@144.81,346.16
NetU17_8: U17.8 U17.9 | length 50
  Top Layer w10: U17.8 U17.9
SHIFT1: R35.1 TP_SHIFT1.1 U1.8 | length 2367.7
  Top Layer w10: v1(795,595) 795,630.02 797,632.02 U1.8 ; v1(2805,255) 2858.93,201.07 R35.1
  Bottom Layer w8: TP_SHIFT1.1 757.32,592.32 792.32,592.32 v1(795,595)
  Bottom Layer w10: v1(795,595) 930,595 1270,255 v1(2805,255)
SHIFT2: R29.1 TP_SHIFT2.1 U4.8 | length 1771
  Top Layer w8: v1(2865,850) 2865.81,849.19 2899.55,849.19 R29.1
  Top Layer w10: U4.8 1335.5,631.53 1436.58,631.53 v1(1437.87,632.81)
  Power w8: v1(2030,850) 2031.15,851.15 v1(2152.88,851.15)
  Bottom Layer w8: v1(2152.88,851.15) 2153.46,850.58 2864.42,850.58 v1(2865,850) 2865,823.33 TP_SHIFT2.1@2858.33,816.67
  Bottom Layer w10: v1(1437.87,632.81) 1439.42,634.37 1439.42,766.19 1523.23,850 v1(2030,850)
SHIFT3: R30.2 TP_SHIFT3.1 U9.8 | length 1502.2
  Top Layer w10: U9.8 1860.72,631.6 1910.45,631.6 v1(1911.24,630.82) ; v1(2930,910) 3100,910 3140.93,869.07 R30.2
  Bottom Layer w8: v1@1908.56,628.14 v1(1911.24,630.82)
  Bottom Layer w10: v1(1911.24,630.82) 1949.18,630.82 TP_SHIFT3.1 2003.78,793.78 2120,910 v1(2930,910)
SHIFT4: R36.2 TP_SHIFT4.1 U14.8 | length 1033
  Top Layer w8: U14.8 2384.51,632.21 v1(2384.51,580.58) ; R36.2 3141.32,200.81 v1(3141.32,165.78)
  Power w8: v1(2834.64,339.64) 2838.42,339.64 3012.28,165.78 v1(3141.32,165.78)
  Bottom Layer w8: v1(2384.51,580.58) 2384.51,576.79 2416.96,544.34 2430.66,544.34 2430.66,519.34 2610,340 v1@2835,340
SIG: BUFF.2 LP.2 R3.1 R5.1 R11.1 R33.1 SIGIN.2 | length 2485.5
  Top Layer w8: R3.1 1117.22,157.21 v1(1155.21,157.21) ; R5.1 1264.21,158.36 v1(1300.77,158.36) ; R11.1 1424.12,157.6 v1(1458.53,157.6)
  Top Layer w10: v1(2960,181) 2960,183.69 2981.88,205.57 R33.1
  Power w8: v1(1458.53,157.6) 1481.93,181 v1(2960,181)
  Bottom Layer w8: 966.51,158.49 967.4,157.6
  Bottom Layer w25: SIGIN.2 665.24,186.36 683.87,205 920,205 966.51,158.49 ; 967.4,157.6 v1(1458.53,157.6)
SIG2: C25.2 R13.1 R19.1 R21.1 R31.1 R38.2 TP_SIG1.1 U15.7 | length 2337.5
  Top Layer w8: R13.1 1563.91,157.42 v1(1610.33,157.42) ; R19.1 1725.94,158.74 v1(1761.4,158.74) ; R21.1 1861.8,159.68 v1(1896.66,159.68) ; R31.1 2984.05,867.38 v1(3010.39,867.38)
  Top Layer w10: v1(2865,250) 2865.23,250.23 2897.23,250.23 C25.2 2897.46,373.68 2903.75,379.98 U15.7
  Bottom Layer w8: TP_SIG1.1 1610.17,199.83 1610.17,157.59 v1(1610.33,157.42)
  Bottom Layer w10: v1(1610.33,157.42) v1@1896.66,157.42 ; v1(1896.66,159.68) 1961.99,225 2840,225 v1(2865,250) 2906.34,291.34 2906.34,763.32 v1(3010.39,867.38)
SIG3: C21.2 R4.1 R6.1 R12.1 R27.2 R32.2 TP_SIG2.1 U15.1 | length 1753.1
  Top Layer w8: R4.1 2028.96,159.11 v1(2066.65,159.11) ; R6.1 2164.32,159.64 v1(2199.22,159.64) ; R12.1 2320.62,159.82 v1(2354.82,159.82)
  Top Layer w10: C21.2 2899.42,686.28 2905.72,679.98 U15.1 2916.92,679.87 2983.16,679.87 v1(2983.27,679.76) ; R32.2 3058.09,867.89 3075.05,867.89 v1(3076.03,868.88)
  Power w8: v1(2199.22,159.64) v1@2199.59,160 ; v1(2565,204) 2619,204 2983.27,568.27 v1(2983.27,679.76)
  Bottom Layer w8: v1(2066.65,159.11) 2066.91,159.38 2198.96,159.38 v1(2199.22,159.64) 2199.32,159.73 2354.73,159.73 2399,204 v1(2565,204)
  Bottom Layer w10: v1(2983.27,679.76) TP_SIG2.1 3076.03,772.52 v1(3076.03,868.88)
SIG4: C22.1 R14.1 R20.1 R22.1 R28.1 R34.2 TP_SIG3.1 U15.14 | length 1412.4
  Top Layer w8: R14.1 2464.67,160 v1(2500,160) ; R20.1 2626.6,160 v1(2660,160) ; R22.1 2766.58,160 v1(2800,160)
  Top Layer w10: v1(3019.51,207.23) 3019.66,207.38 3056.95,207.38 R34.2 ; v1(3057.31,678.9) 3057.85,679.44 3122.49,679.44 U15.14 3135.22,679.98 3141.52,686.28 C22.1
  Bottom Layer w8: v1(3141.11,714.16) 3141.31,714.37 3141.31,756.38 TP_SIG3.1
  Bottom Layer w10: v1(2500,160) v1(2660,160) v1(2800,160) 2972.28,160 v1(3019.51,207.23) 3019.33,207.41 3019.33,640.92 v1(3057.31,678.9)
SIG5: C26.1 R39.1 TP_SIG4.1 U15.8 | length 192.1
  Top Layer w10: U15.8 3135.22,379.98 3141.52,373.68 v1(3141.52,336.76) C26.1
  Bottom Layer w8: TP_SIG4.1 v1(3141.52,336.76)
SIG_BUFF: BUFF.1 R54.1 TP_SIGBUFF1.1 U16.1 U16.2 | length 401.7
  Top Layer w8: R54.1 547.25,518.16 U16.1 U16.2 655.58,468.62 723.62,468.62 v1(724.08,469.08)
  Bottom Layer w8: v1(724.08,469.08) 765,428.16 TP_SIGBUFF1.1 765,321.26 BUFF.1
SIGIN: J1.5 R41.1 R43.1 SIGIN.1 TP_SIGIN1.1 | length 686.5
  Top Layer w25: R43.1 60.67,234.21 60.67,189.39 97.06,153.01 150,153.01 ; R41.1 150,209.28 150,153.01 ; J1.5 371.99,153.01 150,153.01
  Bottom Layer w25: J1.5 451.52,86.52 451.52,107.44 484.08,140 TP_SIGIN1.1 520.98,175.98 SIGIN.1@546.83,175.98
SIGIN_BUFF: R41.2 R46.2 U16.3 | length 620.9
  Top Layer w10: U16.3 655.3,418.35 725.05,418.35 v1(725.23,418.53)
  Top Layer w25: R41.2 378.31,210 403.31,235 v1(475,235)
  Bottom Layer w10: v1(475,235) 658.53,418.53 v1(725.23,418.53)
pads on no net: J1.1 J1.2 J1.3 J1.4 J1.6 J1.7 J1.8 J1.9 J1.10 J1.11 J1.12 J1.13 J1.14 J1.15 J1.16 J1.17 J1.18 J1.19 J1.20 J1.21 J1.22 J1.23 J1.24 J1.25 J1.26 J1.27 J1.28 J1.29 J1.30 J1.31 J1.32 J2.2 J2.4 J2.5 J2.6 J2.7 J2.8 J2.9 J2.10 J2.11 J2.12 J2.13 J2.14 J2.15 J2.16 J2.25 J2.26 J2.27 J2.28 J2.29 J2.30 J2.31 J2.32 R49.1 R49.2 U1.9 U1.10 U1.11 U1.12 U1.13 U4.9 U4.10 U4.11 U4.12 U4.13 U9.9 U9.10 U9.11 U9.12 U9.13 U14.9 U14.10 U14.11 U14.12 U14.13

## Polygon pours and split planes (outlines as drawn)
+5 on Power "+5_L03_P008" (solid, pour order 8): 5,1055 3195,1055 3195,5 5,5
+1.25 on Power "+1.25_L03_P007" (solid, pour order 7): 868.18,730 2602.88,730 2775,576.49 2775,380 2570,175 2195,175 1169.1,170.04 460,563.51 460,630 526.49,630 1084.46,340 1169.44,340 1335.56,225 1617.78,225 1739.17,340 2090,340 2200,230 2525,230 2650,355 2650,570 2503.91,690 868.18,690
+3.75 on Power "+3.75_L03_P004" (solid, pour order 4): 471.6,919.27 501.75,919.27 880.51,675 2485,675 2485,287.6 2340,287.6 2340,427.49 2142.31,630.29 1779.56,630.29 1576.75,427.49 1580,287.6 1436.86,287.6 1436.86,427.49 1200,630.29 880.06,630.29 471.6,878.73
GND on GND "GND_L02_P000" (solid, pour order 0): 5,1055 3195,1055 3195,5 5,5
+2.5 on Bottom Layer "+2.5_L04_P006" (solid, pour order 6): 5,1055 3195,1055 3195,5 5,5

## Text inside footprints (layer, text, board x,y; h text height)
U1: Mechanical 13 "*" at 836.46,769.09 h50
U4: Mechanical 13 "*" at 1360.01,769.09 h50
U9: Mechanical 13 "*" at 1884.93,769.46 h50
U14: Mechanical 13 "*" at 2409.32,769.46 h50